# Altium PCB PCB1.PcbDoc
Units mm, origin at the board's own origin, x right, y up, seen from the top; angles counter-clockwise.
Board outline 200 x 200 mm, 2 copper layers (Top Layer, Bottom Layer); 133 components, 113 nets, 472 pads, 12 vias.
Unrouted connection lines stored in the file: 94.
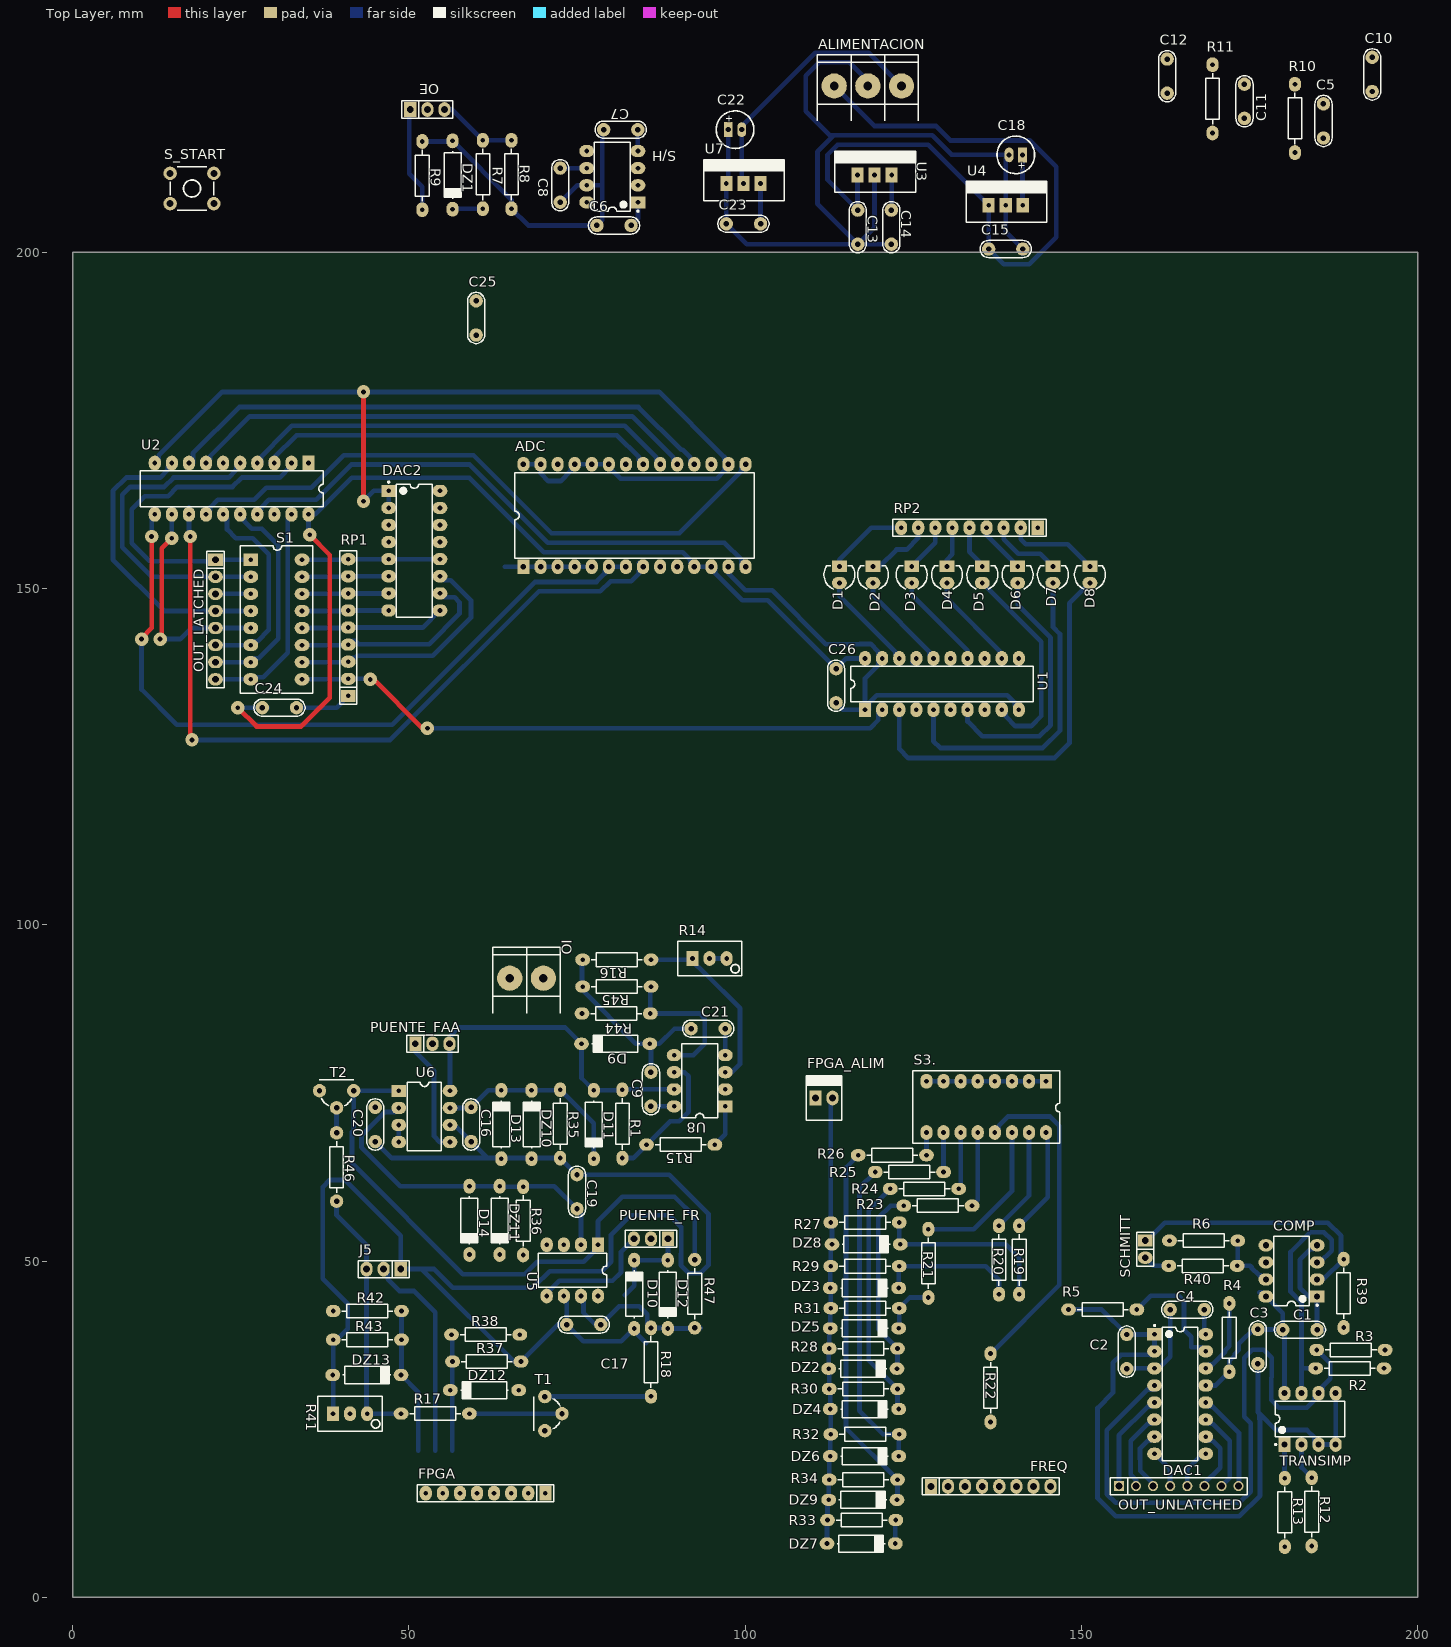
[diagram p0: Top Layer view]
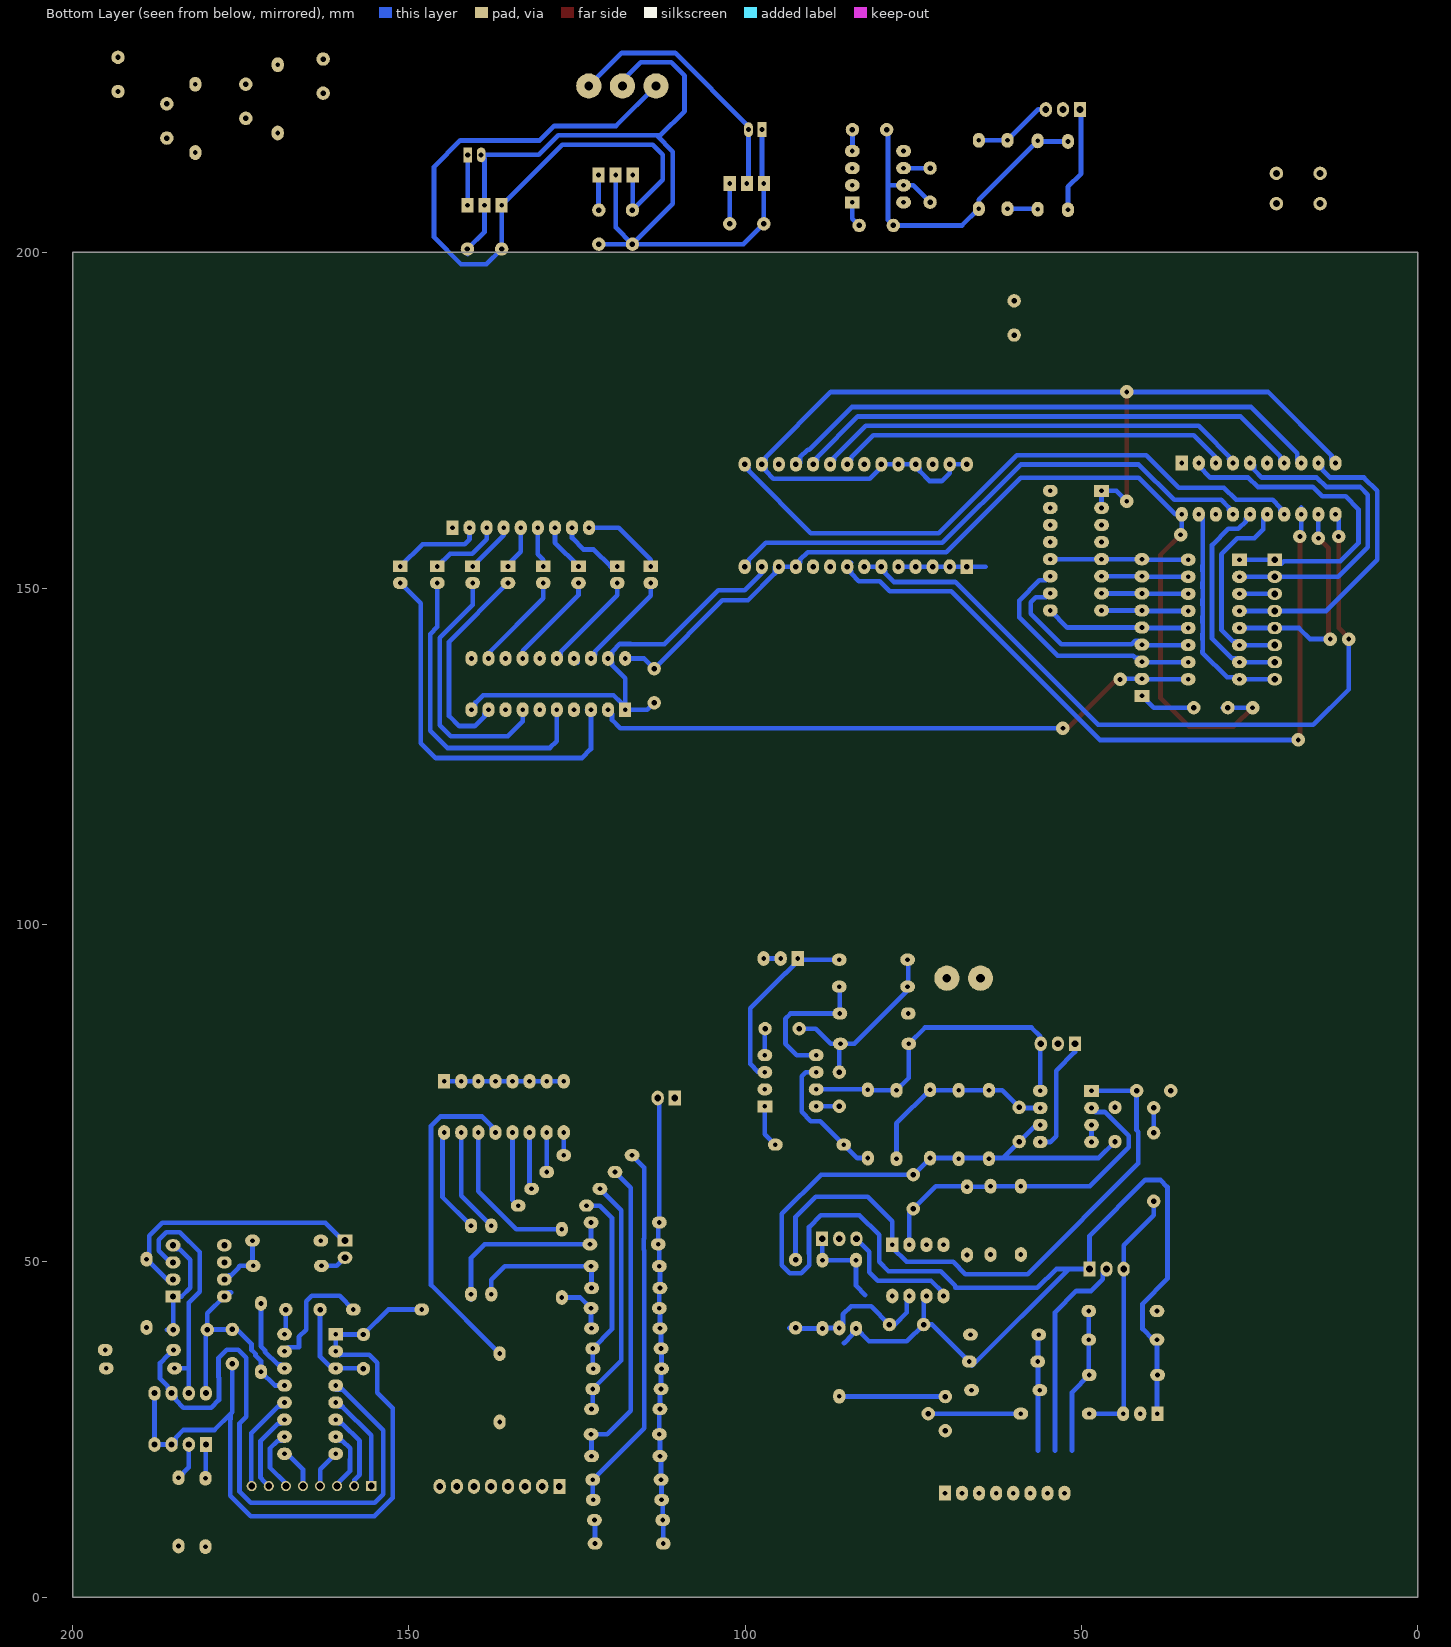
[diagram p1: Bottom Layer view, seen from below]

## Layer stack, top to bottom
Top Solder: solder mask 0.0102, Solder Resist, Dk 3.5
Top Layer: signal copper 0.0356
Dielectric 1: dielectric 0.32, FR-4, Dk 4.8
Bottom Layer: signal copper 0.0356
Bottom Solder: solder mask 0.0102, Solder Resist, Dk 3.5

## Board outline
0,0 0,200 200,200 200,0 0,0

## Design rules (kind name [scope] priority, off if disabled: settings)
Clearance [All] p1: gap=0.7
PolygonConnect [All] p1: connectstyle=Relief reliefconductorwidth=0.254 reliefentries=4 polygonreliefangle="90 Angle" airgapwidth=0.254
RoutingVias [All] p1: holewidth=0.7 width=2 viastyle="Through Hole" minholewidth=0.7 minwidth=2 maxholewidth=0.7 maxwidth=2
SolderMaskExpansion [All] p1: expansion=0.102
Width [All] p1: maxlimit=0.7 minlimit=0.7 preferedwidth=0.7
30 further rules are at their usual default settings.

## Components (designator, comment, footprint, x,y, rotation, side; value= is the part's Value field where it differs from the comment)
ADC "ADC0808CCN" DIP28 67.04,153.26 r90 top
ALIMENTACION "BORNERA 3" BORNERA3 118.25,224.75 r270 top
C1 "100n" CAP200 182.5,39.8 r0 top
C2 "100n" CAP200 156.75,36.55 r270 top
C3 "100n" CAP200 176.25,37.3 r90 top
C4 "10n" CAP200 165.75,42.8 r0 top
C5 "100n" CAP200 186,219.54 r270 top
C6 "100n" CAP200 80.5,204 r180 top
C7 "100n" CAP200 81.5,218.25 r180 top
C8 "10n" CAP200 72.5,210 r270 top
C9 "CAP" CAP200 86,75.57 r90 top
C10 "10n" CAP200 193.25,226.46 r90 top
C11 "100n" CAP200 174.25,222.46 r270 top
C12 "100n" CAP200 162.75,226.21 r270 top
C13 "330n" CAP200 116.75,203.75 r270 top
C14 "100n" CAP200 121.75,203.75 r270 top
C15 "100n" CAP200 138.75,200.5 r0 top
C16 "100n" CAP200 59.25,70.32 r270 top
C17 "100n" CAP200 76,40.57 r0 top
C18 "10u" CAP100RP 140.25,214.5 r180 top
C19 "100n" CAP200 75,60.32 r90 top
C20 "100n" CAP200 45,70.32 r270 top
C21 "CAP" CAP200 94.5,84.57 r180 top
C22 "2.2u" CAP100RP 98.5,218.25 r0 top
C23 "1u" CAP200 99.75,204.25 r180 top
C24 "100n" CAP200 30.75,132.3 r0 top
C25 "CAP" CAP200 60,190.25 r90 top
C26 "CAP" CAP200 113.52,135.56 r270 top
COMP "LM311N" N08E#1 181.25,48.55 r180 top
D1 "LED" LED3 114.02,152.06 r90 top
D2 "LED" LED3 119.02,152.06 r90 top
D3 "LED" LED3 124.77,152.06 r90 top
D4 "LED" LED3 130.02,152.06 r90 top
D5 "LED" LED3 135.27,152.06 r90 top
D6 "LED" LED3 140.52,152.06 r90 top
D7 "LED" LED3 145.77,152.06 r90 top
D8 "LED" LED3 151.27,152.06 r90 top
D9 "DIODO" DO41 80.75,82.32 r180 top
D10 "DIODO" DO41 83.5,45.07 r90 top
D11 "DIODO" DO41 77.5,70.32 r270 top
D12 "DIODO" DO41 88.5,45.07 r270 top
D13 "DIODO" DO41 63.75,70.32 r90 top
D14 "DIODO" DO41 59,56.07 r270 top
DAC1 "DAC0800LCN" N16E 164.69,30.24 r0 top
DAC2 "DAC0800LCN" N16E 50.81,155.65 r0 top
DZ1 "3.3V" DO41 56.5,211.5 r270 top
DZ2 "3.6V" DO41 117.5,34 r0 top
DZ3 "3.6V" DO41 117.75,46 r0 top
DZ4 "3.6V" DO41 117.75,28 r0 top
DZ5 "3.6V" DO41 117.75,40 r0 top
DZ6 "3.6V" DO41 117.75,21 r0 top
DZ7 "3.6V" DO41 117.25,8 r0 top
DZ8 "3.6V" DO41 118,52.5 r0 top
DZ9 "3.6V" DO41 117.5,14.5 r0 top
DZ10 "5.6V" DO41 68.25,70.32 r90 top
DZ11 "5.6V" DO41 63.5,56.07 r270 top
DZ12 "3.6V" DO41 61.25,30.82 r180 top
DZ13 "3.6V" DO41 43.75,33.07 r0 top
FPGA "CON8" SIP8#1 70.29,15.5 r180 top
FPGA_ALIM "MOLEX2" MOLEX2 110.46,74.25 r0 top
FREQ "CON8" SIP8#2 127.63,16.5 r0 top
IO "BORNERA 2" BORNERA2 67.5,92.07 r270 top
J5 "SAR/MOD" JUMPER3 46.25,48.82 r180 top
OE "JUMPER" JUMPER3 52.75,221.25 r0 top
OUT_LATCHED "CON8" SIP8#2 21.25,154.3 r270 top
OUT_UNLATCHED "CON8" SIP8#3 155.59,16.55 r0 top
PUENTE_FAA "JUMPER" JUMPER3 53.5,82.32 r0 top
PUENTE_FR "JUMPER" JUMPER3 86,53.32 r180 top
R1 "4k7" RES400#1 81.75,65.32 r90 top
R2 "1K5" RES400#1 184.84,34.05 r0 top
R3 "1K" RES400#1 195.16,36.8 r180 top
R4 "5K" RES400#1 172,43.71 r270 top
R5 "5K" RES400#1 158.25,42.8 r180 top
R6 "1K" RES400#1 173.25,53.05 r180 top
R7 "560" RES400#1 61,206.5 r90 top
R8 "1K" RES400#1 65.25,206.5 r90 top
R9 "1K" RES400#1 52,216.5 r270 top
R10 "5K" RES400#1 181.75,225 r270 top
R11 "5K" RES400#1 169.5,227.91 r270 top
R12 "1K" RES400#1 184.25,17.8 r270 top
R13 "1k5" RES400#1 180.25,7.55 r90 top
R14 "10k" "PRESET V" 94.71,95 r0 top
R15 "4k7" RES400#1 95.5,67.32 r180 top
R16 "4k7" RES400#1 86,94.82 r180 top
R17 "2k2" RES400#1 59,27.32 r180 top
R18 "6k8" RES400#1 86,29.91 r90 top
R19 "10k" RES400#1 140.75,55.25 r270 top
R20 "10k" RES400#1 137.75,55.25 r270 top
R21 "10k" RES400#1 127.25,54.75 r270 top
R22 "10k" RES400#1 136.5,36.25 r270 top
R23 "10k" RES400#1 133.75,58.25 r180 top
R24 "10k" RES400#1 131.75,60.75 r180 top
R25 "10k" RES400#1 129.51,63.25 r180 top
R26 "10k" RES400#1 126.97,65.75 r180 top
R27 "22k" RES400#1 112.75,55.75 r0 top
R28 "22k" RES400#1 112.5,37 r0 top
R29 "22k" RES400#1 112.75,49.25 r0 top
R30 "22k" RES400#1 112.5,31 r0 top
R31 "22k" RES400#1 112.75,43 r0 top
R32 "22k" RES400#1 112.75,24.25 r0 top
R33 "22k" RES400#1 112.25,11.5 r0 top
R34 "22k" RES400#1 112.5,17.5 r0 top
R35 "10k" RES400#1 72.5,65.32 r90 top
R36 "10k" RES400#1 67,50.91 r90 top
R37 "20k" RES400#1 56.5,35.07 r0 top
R38 "10k" RES400#1 66.5,39.07 r180 top
R39 "TBD" RES400#1 189,40.14 r90 top
R40 "TBD" RES400#1 163,49.3 r0 top
R41 "PRESET" "PRESET V" 41.25,27.32 r0 top
R42 "10K" RES400#1 38.75,42.57 r0 top
R43 "20K" RES400#1 38.75,38.32 r0 top
R44 "4k7" RES400#1 75.75,86.82 r0 top
R45 "4k7" RES400#1 86,90.82 r180 top
R46 "2k2" RES400#2 39.25,69.07 r270 top
R47 "6k8" RES400#2 92.5,40.07 r90 top
RP1 "R-PACK 8+1" RESNET8+1 41,134.05 r90 top
RP2 "R-PACK 8+1" RESNET8+1 143.52,159.06 r180 top
S1 "SW-DIP8" DIP-16-KEY 26.5,154.3 r270 top
S3. "SW-DIP8" DIP-16-KEY 144.75,76.75 r180 top
S/H "LF398N" N08E#2 80.25,211.25 r180 top
S_START "TACT SWITCH" TACTSWITCH 17.75,209.5 r90 top
SCHMITT "JUMPER" JUMPER2 159.5,51.78 r270 top
T1 "TRANSISTOR NPN" TO92 71.5,27.32 r90 top
T2 "TRANSISTOR NPN" TO92 39.25,74.07 r0 top
TRANSIMP "LM358N" N08E#1 184,26.55 r90 top (schematic designator TRANSIMPEDANCIA)
U1 "SN74LS244N" 738-03 129.27,135.81 r0 top
U2 "MC74HC374N" 738-03 23.65,164.86 r180 top
U3 "7805" "TO-220 V" 119.25,211.5 r0 top
U4 "MC33269" "TO-220 V" 138.75,207 r0 top
U5 "MAX297CPA" DIP8 78.12,52.44 r270 top
U6 "MAX297CPA" DIP8 48.5,75.32 r0 top
U7 "7905" "TO-220 V" 99.75,210.25 r0 top
U8 "TL082ACJG" 693-02 93.25,76.82 r90 top

## Footprints (in the part's own frame and the unit in brackets; to place one, negate y for a bottom-side part, rotate by r counter-clockwise, add the part's x,y. Pads: shape width x height; smd on the part's side, far side on the other; paste and mask are expansions set on the pad)
693-02 [mm] "DIP; 8 Leads; Row Spacing 7.62 mm; Pitch 2.54 mm"
  rect 1.8x2.2 hole 0.7: 1(-3.81,-3.81)
  oval 1.8x2.2 hole 0.7: 2(-1.27,-3.81) 3(1.27,-3.81) 4(3.81,-3.81) 5(3.81,3.81) 6(1.27,3.81) 7(-1.27,3.81) 8(-3.81,3.81)
  silkscreen extent -5.5,-2.65 5.5,2.65
738-03 [mm] "DIP; 20 Leads; Row Spacing 7.62 mm; Pitch 2.54 mm"
  rect 1.8x2.2 hole 0.7: 1(-11.43,-3.81)
  oval 1.8x2.2 hole 0.7: 2(-8.89,-3.81) 3(-6.35,-3.81) 4(-3.81,-3.81) 5(-1.27,-3.81) 6(1.27,-3.81) 7(3.81,-3.81) 8(6.35,-3.81) 9(8.89,-3.81) 10(11.43,-3.81) 11(11.43,3.81) 12(8.89,3.81) 13(6.35,3.81) 14(3.81,3.81) 15(1.27,3.81) 16(-1.27,3.81) 17(-3.81,3.81) 18(-6.35,3.81) 19(-8.89,3.81) 20(-11.43,3.81)
  silkscreen extent -13.6,-2.65 13.6,2.65
BORNERA2 [mm] "Bornera con Tornillos 5mm separación"
  round 3.75 hole 1.3: 1(0,2.5) 2(0,-2.5)
  silkscreen extent -4.6,-5 5.2,5, body extent -3.76,-4.89 3.94,5.61, height 10
BORNERA3 [mm] "Bornera con Tornillos 5mm separación"
  round 3.75 hole 1.3: 1(0,5) 2(0,0) 3(0,-5)
  silkscreen extent -4.6,-7.5 5.2,7.5, body extent -3.76,-7.39 3.94,8.11, height 10.05
CAP100RP [mm] "Body diameter 5mm"
  rect 1.3x2.2 hole 0.762: 1(-1,0)
  oval 1.3x2.2 hole 0.762: 2(1,0)
  silkscreen extent -2.79,-2.79 2.79,2.79, body extent -2.53,-2.51 2.53,2.54, height 11.53
CAP200 [mm]
  round 2 hole 0.813: 1(-2.54,0) 2(2.54,0)
  silkscreen extent -3.81,-1.27 3.81,1.27, body extent -2.79,-1.17 2.79,1.12, height 6.24
DIP8 [mm]
  rect 2.2x1.8 hole 0.7: 1(0,0)
  oval 2.2x1.8 hole 0.7: 2(0,-2.54) 3(0,-5.08) 4(0,-7.62) 5(7.62,-7.62) 6(7.62,-5.08) 7(7.62,-2.54) 8(7.62,0)
  silkscreen extent 1.27,-8.89 6.35,1.27, body extent -0.06,-9.21 7.7,1.59, height 4.5
DIP28 [mm]
  rect 2.2x1.8 hole 0.813: 1(0,0)
  oval 2.2x1.8 hole 0.813: 2(0,-2.54) 3(0,-5.08) 4(0,-7.62) 5(0,-10.16) 6(0,-12.7) 7(0,-15.24) 8(0,-17.78) 9(0,-20.32) 10(0,-22.86) 11(0,-25.4) 12(0,-27.94) 13(0,-30.48) 14(0,-33.02) 15(15.24,-33.02) 16(15.24,-30.48) 17(15.24,-27.94) 18(15.24,-25.4) 19(15.24,-22.86) 20(15.24,-20.32) 21(15.24,-17.78) 22(15.24,-15.24) 23(15.24,-12.7) 24(15.24,-10.16) 25(15.24,-7.62) 26(15.24,-5.08) 27(15.24,-2.54) 28(15.24,0)
  silkscreen extent 1.27,-34.29 13.97,1.27, body extent -0.19,-34.54 15.43,1.47, height 4.66
DIP-16-KEY [mm] "DIP; 16 Leads; Row Spacing 7.62 mm; Pitch 2.54 mm"
  rect 1.8x2.2 hole 0.7: 1(0,0)
  oval 1.8x2.2 hole 0.7: 2(2.54,0) 3(5.08,0) 4(7.62,0) 5(10.16,0) 6(12.7,0) 7(15.24,0) 8(17.78,0) 9(17.78,7.62) 10(15.24,7.62) 11(12.7,7.62) 12(10.16,7.62) 13(7.62,7.62) 14(5.08,7.62) 15(2.54,7.62) 16(0,7.62)
  silkscreen extent -2.05,-1.59 19.83,9.2
DO41 [mm]
  oval 2.2x1.8 hole 0.7: 1(-5.08,0) 2(5.08,0)
  silkscreen extent -3.56,-1.27 3.56,1.27, body extent -5.46,-1.19 5.46,1.37, height 2.03
JUMPER2 [mm]
  rect 1.8x2.2 hole 1.016: 1(-1.27,0)
  oval 1.8x2.2 hole 1.016: 2(1.27,0)
  silkscreen extent -2.54,-1.27 2.54,1.27, body extent -2.46,-1.27 2.54,1.27, height 9.5
JUMPER3 [mm]
  rect 1.8x2.2 hole 1.016: 1(-2.54,0)
  oval 1.8x2.2 hole 1.016: 2(0,0) 3(2.54,0)
  silkscreen extent -3.81,-1.27 3.81,1.27, body extent -3.81,-1.3 3.81,1.27, height 16.15
LED3 [mm]
  oval 1.8x2.2 hole 0.7: 1(-1.219,0)
  rect 1.7x2.2 hole 0.7: 2(1.245,0)
  silkscreen extent -2.13,-2.3 1.36,2.3, body extent -1.65,-1.63 1.65,1.66, height 0.49
MOLEX2 [mm]
  rect 1.8x2.2 hole 1.016: 1(0,0)
  oval 1.8x2.2 hole 1.016: 2(2.54,0)
  silkscreen extent -1.4,-3.3 3.94,3.3, body extent -1.27,-3.17 3.81,3.17, height 10.74
N08E#1 [mm] "DIP, 8-Leads, Row Spacing 7.62mm, Pitch 2.54mm, Body 9.91x6.35mm"
  rect 2.2x1.8 hole 0.9: 1(-3.81,3.81)
  oval 2.2x1.8 hole 0.9: 2(-3.81,1.27) 3(-3.81,-1.27) 4(-3.81,-3.81) 5(3.81,-3.81) 6(3.81,-1.27) 7(3.81,1.27) 8(3.81,3.81)
  silkscreen extent -3.94,-5.15 2.65,5.23, body extent -3.6,-5.15 3.6,5.15, height 5.34
N08E#2 [mm] "DIP, 8-Leads, Row Spacing 7.62mm, Pitch 2.54mm, Body 9.91x6.35mm"
  rect 2.2x1.8 hole 0.7: 1(-3.81,3.81)
  oval 2.2x1.8 hole 0.7: 2(-3.81,1.27) 3(-3.81,-1.27) 4(-3.81,-3.81) 5(3.81,-3.81) 6(3.81,-1.27) 7(3.81,1.27) 8(3.81,3.81)
  silkscreen extent -3.94,-5.15 2.65,5.23, body extent -3.6,-5.15 3.6,5.15, height 5.34
N16E [mm] "DIP, 16-Leads, Row Spacing 7.62mm, Pitch 2.54mm, Body 19.3x6.35mm"
  rect 2.2x1.8 hole 0.7: 1(-3.81,8.89)
  oval 2.2x1.8 hole 0.7: 2(-3.81,6.35) 3(-3.81,3.81) 4(-3.81,1.27) 5(-3.81,-1.27) 6(-3.81,-3.81) 7(-3.81,-6.35) 8(-3.81,-8.89) 9(3.81,-8.89) 10(3.81,-6.35) 11(3.81,-3.81) 12(3.81,-1.27) 13(3.81,1.27) 14(3.81,3.81) 15(3.81,6.35) 16(3.81,8.89)
  silkscreen extent -3.93,-9.9 2.65,10.31, body extent -3.3,-9.9 3.3,9.9, height 4.32
"PRESET V" [mm]
  rect 1.8x2.2 hole 0.7: 1(-2.54,0)
  oval 1.8x2.2 hole 0.7: 2(0,0) 3(2.54,0)
  silkscreen extent -4.76,-2.6 4.76,2.6, body extent -4.7,-2.42 4.83,2.42, height 11.55
RES400#1 [mm]
  oval 2.2x1.8 hole 0.7: 1(0,0) 2(10.16,0)
  silkscreen extent 1.27,-1.02 8.89,1.02, body extent -0.3,-1.14 10.46,1.17, height 2.43
RES400#2 [mm]
  round 2 hole 0.813: 1(0,0) 2(10.16,0)
  silkscreen extent 1.27,-1.02 8.89,1.02, body extent -0.3,-1.14 10.46,1.17, height 2.43
RESNET8+1 [mm]
  rect 1.8x2.2 hole 0.7: 1(0,0)
  oval 1.8x2.2 hole 0.7: 2(2.54,0) 3(5.08,0) 4(7.62,0) 5(10.16,0) 6(12.7,0) 7(15.24,0) 8(17.78,0) 9(20.32,0)
  silkscreen extent -1.27,-1.27 21.59,1.27, body extent -1.09,-0.64 21.41,0.62, height 5.3
SIP8#1 [mm]
  rect 1.8x2.2 hole 0.7: 1(0,0)
  oval 1.8x2.2 hole 0.7: 2(2.54,0) 3(5.08,0) 4(7.62,0) 5(10.16,0) 6(12.7,0) 7(15.24,0) 8(17.78,0)
  silkscreen extent -1.27,-1.27 19.05,1.27, body extent -1.27,-1.27 19.05,1.27, height 8.38
SIP8#2 [mm]
  rect 1.8x2.2 hole 1.016: 1(0,0)
  oval 1.8x2.2 hole 1.016: 2(2.54,0) 3(5.08,0) 4(7.62,0) 5(10.16,0) 6(12.7,0) 7(15.24,0) 8(17.78,0)
  silkscreen extent -1.27,-1.27 19.05,1.27, body extent -1.27,-1.27 19.05,1.27, height 8.38
SIP8#3 [mm]
  rect 1.5x1.5 hole 1.016: 1(0,0)
  round 1.5 hole 1.016: 2(2.54,0) 3(5.08,0) 4(7.62,0) 5(10.16,0) 6(12.7,0) 7(15.24,0) 8(17.78,0)
  silkscreen extent -1.27,-1.27 19.05,1.27, body extent -1.27,-1.27 19.05,1.27, height 8.38
TACTSWITCH [mm]
  round 2 hole 1.016: 1(-2.25,-3.25) 2(-2.25,3.25) 3(2.25,-3.25) 4(2.25,3.25)
  silkscreen extent -3.25,-3.25 3.25,3.25, body extent -3.05,-3.95 3.15,3.95, height 7
TO92 [mm]
  round 2 hole 0.813: 1(0,-1.27) 2(2.54,1.27) 3(-2.54,1.27)
  silkscreen extent -2.54,-1 2.54,2.92, body extent -2.79,-1.55 2.79,2.79, height 8
"TO-220 V" [mm]
  rect 1.8x2.2 hole 0.7: 1(-2.54,0) 2(0,0) 3(2.54,0)
  silkscreen extent -5.9,-2.54 6.1,3.54, body extent -5,-2 5,3, height 18

## Part data
ADC: "28 pin 8-bit Microprocessor Compatible A/D Converters With 8-Channel Multiplexer 13 per tube"
C1 C2 C3 C4 C5 C6 C7 C8 C10 C11 C12 C13 C14 C15 C16 C17 C19 C20 C23 C24: library part CAP
C18 C22: library part CAPPOL
COMP: "Voltage Comparator, 8-pin MDIP"
DAC1 DAC2: "8-Bit D/A Converter, 16-pin MDIP"
DZ1 DZ2 DZ3 DZ4 DZ5 DZ6 DZ7 DZ8 DZ9 DZ10 DZ11 DZ12 DZ13: library part "DIODO ZENER"
J5 OE PUENTE_FAA PUENTE_FR: library part JUMPER3
R1 R2 R3 R4 R5 R6 R7 R8 R9 R10 R11 R12 R13 R15 R16 R17 R18 R19 R20 R21 R22 R23 R24 R25 R26 R27 R28 R29 R30 R31 R32 R33 R34 R35 R36 R37 R38 R39 R40 R42 R43 R44 R45 R46 R47: library part RES
R14: library part PRESET
S1 S3.: "4009 Series DIP Switch, Raised actuator"
S/H: "Monolithic Sample and Hold Circuits, 8-pin MDIP"
TRANSIMP: "Low Power Dual Operational Amplifier, 8-pin MDIP"
U1: "Octal Buffer/Line Driver with 3-State Outputs"
U2: "Octal 3-State Non-Inverting D-Type Flip-Flop"
U3 U4: library part 78XX, "REGULDOR POSITIVO"
U5 U6: "Active Filter Single SW-CAP Low Pass 8th Order 50kHz 8-Pin PDIP N"
U7: library part 79XX, "REGULADOR NEGATIVO"
U8: "JFET-Input Operational Amplifier"

## Via types
v1: diameter 2, hole 0.711, Top Layer to Bottom Layer, 12 vias

## Nets (pads, with @x,y where several pads share a name; then routed paths per layer and width w, separated by ;. In a path a pad name is that pad's centre, name@x,y a point inside that pad or via, vN(x,y) a via of type N, cw(c..) or ccw(c..) an arc to the next point about the centre after c; other vN are vias at no path point)
B0: DAC2.5 DAC2.12 RP1.2 RP1.9 S1.9 S1.16 U1.2 U1.17 | length 112
  Top Layer w0.7: v1(44.25,136.5) 44.75,136.5 52,129.25 v1(52.75,129.25)
  Bottom Layer w0.7: S1.9 RP1.2@40.93,136.52 ; S1.16 RP1.9@40.93,154.3 ; RP1.2 v1@44.09,136.59 ; RP1.9 46.99,154.37 DAC2.5 DAC2.12 ; v1(52.75,129.25) 118.575,129.25 119.79,130.465 119.79,131.41 U1.2 ; U1.17@124.87,139.03 U1.17
B1: DAC2.11 RP1.3 S1.10 U1.15 | length 36.4
  Bottom Layer w0.7: S1.10 RP1.3@40.93,139.06 ; RP1.3 41.59,139.72 42.008,139.72 42.288,140 53.54,140 59.25,145.71 59.25,148.23 56.23,151.25 55.21,151.25 DAC2.11
B2: DAC2.10 RP1.4 S1.11 U1.13 | length 30.9
  Bottom Layer w0.7: S1.11 RP1.4@40.93,141.6 ; RP1.4 41.59,142.26 42.008,142.26 42.518,141.75 53,141.75 57.52,146.27 57.52,147.98 56.79,148.71 55.21,148.71 DAC2.10 DAC2.10@54.7,149.3
B3: DAC2.9 RP1.5 S1.12 U1.11 | length 21.5
  Bottom Layer w0.7: S1.12 RP1.5@40.93,144.14 ; RP1.5 52.07,144.21 DAC2.9
B4: DAC2.8 RP1.6 S1.13 U1.8 | length 12.8
  Bottom Layer w0.7: S1.13 RP1.6@40.93,146.68 ; RP1.6 41.01,146.76 DAC2.8
B5: DAC2.7 RP1.7 S1.14 U1.6 | length 12.8
  Bottom Layer w0.7: S1.14 RP1.7@40.93,149.22 ; RP1.7 46.99,149.29 DAC2.7
B6: DAC2.6 RP1.8 S1.15 U1.4 | length 12.8
  Bottom Layer w0.7: S1.15 RP1.8@40.93,151.76 ; RP1.8 41.01,151.84 DAC2.6
CLK_9FS: FPGA.6 T1.3 | length 0.5
  Top Layer w0.7: T1.3 T1.3@70.23,25.27
CLK_DAC: ADC.10 R18.1 T1.2 | length 14.8
  Bottom Layer w0.7: T1.2 84.96,29.86 85,29.82
CLK_FILTRO: FPGA.7 T2.3
FPGA_OE: DZ1.2 R7.1 R38.1 U2.1 | length 4.4
  Bottom Layer w0.7: DZ1.2@56.58,206.5 R7.1
FR_IN: D10.2 D12.1 PUENTE_FR.1 R13.2 TRANSIMP.1 U5.8 | length 18.9
  Bottom Layer w0.7: 82.13,44.95 83.5,46.32 D10.2 D12.1 88.54,50.19 PUENTE_FR.1 ; R13.2@180.19,17.77 TRANSIMP.1
GND: ADC.1 ADC.2 ADC.3 ADC.4 ADC.5 ADC.13 ADC.16 ADC.23 ADC.24 ADC.25 ADC.27 ADC.28 ALIMENTACION.2 C1.2 C2.1 C3.1 C5.2 C6.2 C7.2 C8.2 C9.2 C11.1 C12.1 C13.2 C14.2 C15.2 C16.2 C17.1 C18.2 C19.2 C20.2 C21.2 C22.1 C23.2 C24.2 C25.1 C26.2 COMP.1 COMP.4 D9.1 D10.1 D13.1 D14.2 DAC1.1 DAC1.2 DAC2.1 DAC2.2 DZ1.1 DZ2.1 DZ3.1 DZ4.1 DZ5.1 DZ6.1 DZ7.1 DZ8.1 DZ9.1 DZ10.1 DZ11.2 DZ12.1 DZ13.1 FPGA_ALIM.2 J5.1 R5.2 R8.1 R9.1 R11.1 R16.2 R27.1 R28.1 R29.1 R30.1 R31.1 R32.1 R33.1 R34.1 R35.1 R36.1 R37.2 R41.1 R43.1 R45.2 RP1.1 RP2.1 S/H.7 TRANSIMP.3 TRANSIMP.4 TRANSIMP.5 U1.1 U1.10 U1.19 U2.10 U3.2 U4.2 U5.6 U6.6 U7.1 | length 897.5
  Top Layer w0.7: v1(43.25,163) 43.5,163.25 43.25,163.5 v1(43.25,179.25)
  Bottom Layer w0.7: U2.10@12.01,168.46 U2.10 12.81,169.26 12.81,169.81 22.25,179.25 v1(43.25,179.25) 87.25,179.25 96.93,169.57 96.93,169.09 ADC.16 96.93,167.91 96.93,167.492 95.788,166.35 81.472,166.35 79.74,168.082 ADC.23 ADC.24 ADC.25 74.07,167.91 74.07,167.492 72.578,166 70.75,166 69.58,167.17 ADC.27 ADC.28 ; C24.2 39.25,132.3 RP1.1 ; R41.1@38.75,27.36 R43.1 39.3,38.32 40.9,39.92 40.9,43.67 37.2,47.37 37.2,61.02 38.25,62.07 40.5,62.07 48.79,53.78 J5.1 51.91,48.82 ; v1(43.25,163) 44.79,164.54 DAC2.1 DAC2.2 ; C20.2 47.46,65.32 61.71,65.32 ; R9.1 DZ1.1@56.42,216.5 ; U6.6@56,70.24 U6.6 56.79,70.24 C16.2 61.71,65.32 ; DZ1.1 65.25,207.83 R8.1 67.75,204 C6.2 78.75,204.79 78.75,209.75 ; 64.26,153.26 ADC.1 ADC.2 ADC.3 ADC.4 ADC.5 ; R37.2@66.25,34.48 51.91,48.82 ; R37.2 72.16,40.57 C17.1 ; C8.2 75.02,209.98 S/H.7 78.52,209.98 78.75,209.75 ; U5.6 73.46,44.4 C17.1 ; R16.2 75.75,94.73 75.75,90.32 83.75,82.32 D9.1 87.25,82.32 89.5,84.57 C21.2 ; C7.2@78.75,218.04 78.75,209.75 ; 85.292,37.82 84.05,39.062 84.05,39.99 D10.1 81.58,38.07 75.96,38.07 C17.1 ; C9.2 D9.1@86,82.15 ; ADC.13@96.97,153.26 ADC.13 97.52,152.282 100.052,149.75 104,149.75 112,141.75 117.012,141.75 117.032,141.77 118.648,141.77 119.79,140.628 119.79,140.21 U1.19 119.79,139.03 119.79,138.612 117.84,136.662 U1.1 ; U7.1 C23.2 100.25,201.21 C13.2 ; U7.1@97.5,210.54 C22.1 ; DZ7.1@112.46,7.71 DZ7.1 112.17,11.42 R33.1 112.25,14.33 DZ9.1 112.42,17.42 R34.1 112.5,20.83 DZ6.1 112.67,24.17 R32.1 112.75,27.92 DZ4.1 112.67,30.83 R30.1 112.5,33.92 DZ2.1 112.42,36.92 R28.1 112.5,39.83 DZ5.1 112.67,42.92 R31.1 112.75,45.92 DZ3.1 112.67,49.17 R29.1 112.75,52.33 DZ8.1 R27.1@112.92,55.58 ; R27.1 112.75,74 FPGA_ALIM.2 ; C26.2 114.54,132 U1.1 ; ALIMENTACION.2 118.25,225.5 115.5,228.25 111,228.25 109,226.25 109,221 112.6,217.4 113.17,217.4 ; U3.2 119.25,203.71 C13.2 ; C14.2 C13.2 ; U1.10 140.11,132.59 140.11,133.118 140,133.118 138.968,134.15 119.572,134.15 118.43,133.008 118.43,132.03 118.4,132 U1.1 ; C15.2@141.25,199.75 141.29,199.79 C15.2 138.75,203.04 U4.2 138.75,214 C18.2 130.69,214.5 127.79,217.4 113.17,217.4 ; R5.2 153.04,42.8 C2.1 160.84,39.09 DAC1.1 DAC1.2 160.29,36 160.29,36.06 155.901,36.06 154.7,34.859 154.7,30.41 152.42,28.13 152.39,28.16 152.39,14.785 155.125,12.05 173.48,12.05 176.57,15.14 176.57,26.46 176.5,26.53 176.5,27.3 ; C3.1 176.25,27.55 176.5,27.3 ; COMP.4 184.47,51.77 184.052,51.77 182.5,50.218 182.5,46.05 183.81,44.74 COMP.1 185.04,44.72 C1.2 C1.2@186,39.8 ; TRANSIMP.5 TRANSIMP.4 TRANSIMP.3 185.27,23.158 184.852,22.74 184.68,22.74 184.68,23.748 183.538,24.89 178.91,24.89 176.5,27.3 ; 51.91,48.82 53.75,48.82 56.542,46.028 68.75,46.028 68.75,46.32 70.93,48.5 78.68,48.5 80.07,49.89 80.07,53.89 83,56.82 88.73,56.82 90.49,55.06 90.49,51.119 90.45,51.079 90.45,49.381 91.651,48.18 93.349,48.18 94.55,49.381 94.55,57.02 88.71,62.86 C19.2 74.96,62.86 R35.1 68.25,65.32 61.71,65.32 ; 113.17,217.4 110.75,214.98 110.75,207.21 C13.2
NetADC_8: ADC.8 U2.13 | length 113.5
  Top Layer w0.7: v1(17.5,157.75) 17.5,127.75 v1(17.75,127.5)
  Bottom Layer w0.7: v1@17.3,158.05 U2.13 U2.13@17.3,162.05 ; v1@17.5,127.75 v1(17.75,127.5) 47.25,127.5 69.35,149.6 78.478,149.6 79.988,151.11 83.088,151.11 84.23,152.252 84.23,152.67 ADC.8 ADC.8@84.23,153.85
NetADC_14: ADC.14 U2.17 | length 82.8
  Bottom Layer w0.7: U2.17 28.05,161.64 28.05,162.058 29.192,163.2 36.2,163.2 41.45,168.45 59.03,168.45 70.67,156.81 96.928,156.81 99.47,154.268 99.47,153.26 ADC.14
NetADC_15: ADC.15 U2.14 | length 93.4
  Bottom Layer w0.7: U2.14 20.43,161.64 20.43,162.058 21.572,163.2 27,163.2 28.8,165 35.5,165 40.35,169.85 59.61,169.85 71.21,158.25 90.228,158.25 99.47,167.492 99.47,167.91 ADC.15
NetADC_17: ADC.17 U2.18
NetADC_18: ADC.18 U2.8 | length 83.5
  Bottom Layer w0.7: U2.8 17.89,168.67 17.89,170.12 24.77,177 84.142,177 90.492,170.65 90.708,170.65 91.85,169.508 91.85,168.67 92.27,168.67 ADC.18
NetADC_19: ADC.19 U2.7 | length 76.4
  Bottom Layer w0.7: U2.7 20.43,169.26 20.43,169.68 26.35,175.6 83.218,175.6 89.31,169.508 89.31,169.09 ADC.19
NetADC_20: ADC.20 U2.4 | length 67.4
  Bottom Layer w0.7: U2.4 27.46,168.7 U2.4@27.51,168.75 ; U2.4@28.05,169.29 U2.4@28.01,169.25 ; ADC.20 86.77,169.09 86.77,169.508 82.078,174.2 32.572,174.2 27.122,168.75 U2.4@27.51,168.75 ; U2.4@27.51,168.75 28.01,168.75 U2.4@28.01,169.25 ; U2.4@27.51,168.75 U2.4@28.01,169.25
NetADC_21: ADC.21 U2.3 | length 59.6
  Bottom Layer w0.7: U2.3@29.41,168.67 U2.3 30,169.5 33.3,172.8 80.938,172.8 84.23,169.508 84.23,169.09 ADC.21
NetC4_2: C4.2 DAC1.16 | length 3.8
  Bottom Layer w0.7: C4.2 168.29,39.34 DAC1.16
NetC8_1: C8.1 S/H.6 | length 3.9
  Bottom Layer w0.7: C8.1 72.52,212.52 S/H.6
NetC10_1: C10.1 DAC2.16
NetCOMP_2: COMP.2 R39.2 SCHMITT.1 | length 39.9
  Bottom Layer w0.7: SCHMITT.1 159.75,53.05 162.41,55.71 186.648,55.71 188.61,53.748 188.61,50.69 R39.2 185.98,47.28 COMP.2 COMP.2@185.08,47.3
NetCOMP_3: COMP.3 R2.1 TRANSIMP.7 | length 36.6
  Bottom Layer w0.7: TRANSIMP.7@182.73,29.82 TRANSIMP.7 182.73,34.05 ; R2.1 182.73,34.05 ; COMP.3 185.478,49.82 187.21,51.552 187.21,53.168 186.068,54.31 184.052,54.31 181.1,51.358 181.1,45.47 182.73,43.84 182.73,34.05
NetD1_1: D1.1 U1.18 | length 14.9
  Bottom Layer w0.7: D1.1 114.02,148.938 122.33,140.628 122.33,140.21 U1.18
NetD1_2: D1.2 RP2.9 | length 12.2
  Bottom Layer w0.7: D1.2 114.02,154.31 118.77,159.06 RP2.9
NetD2_1: D2.1 U1.16 | length 14.9
  Bottom Layer w0.7: D2.1 119.02,149.018 127.41,140.628 127.41,140.21 U1.16
NetD2_2: D2.2 RP2.8 | length 10
  Bottom Layer w0.7: D2.2 120.015,153.305 122.52,155.81 124.02,155.81 125.74,157.53 RP2.8
NetD3_1: D3.1 U1.14 | length 14.7
  Bottom Layer w0.7: D3.1 124.77,149.06 133.08,140.75 U1.14
NetD3_2: D3.2 RP2.7 | length 7.2
  Bottom Layer w0.7: D3.2 128.28,156.815 RP2.7
NetD4_1: D4.1 U1.12 | length 14.6
  Bottom Layer w0.7: D4.1 130.02,148.56 138.16,140.42 U1.12
NetD4_2: D4.2 RP2.6 | length 6.1
  Bottom Layer w0.7: D4.2 130.02,154.31 130.82,155.11 RP2.6
NetD5_1: D5.1 U1.9 | length 31.6
  Bottom Layer w0.7: D5.1 144.02,142.091 144.02,131.06 142.52,129.56 140.182,129.56 138.75,130.992 138.75,131.41 U1.9 U1.9@138.16,131.57
NetD5_2: D5.2 RP2.5 | length 6.5
  Bottom Layer w0.7: RP2.5 133.36,155.47 135.27,153.56 D5.2
NetD6_1: D6.1 U1.7 | length 38.8
  Bottom Layer w0.7: U1.7 133.08,130.25 135.27,128.06 143.77,128.06 145.42,129.71 145.42,142.671 140.52,147.571 D6.1
NetD6_2: D6.2 RP2.4 | length 7.7
  Bottom Layer w0.7: RP2.4 135.9,157.925 D6.2
NetD7_1: D7.1 U1.5 | length 47.4
  Bottom Layer w0.7: U1.5 128,127.33 129.02,126.31 144.27,126.31 146.82,128.86 146.82,143.251 145.77,144.301 D7.1
NetD7_2: D7.2 RP2.3 | length 10.7
  Bottom Layer w0.7: RP2.3 138.44,157.365 140.6,155.205 143.87,155.205 D7.2
NetD8_1: D8.1 U1.3 | length 58.3
  Bottom Layer w0.7: U1.3@123.51,132 U1.3 122.92,126.16 124.27,124.81 146,124.81 148.22,127.03 148.22,147.791 D8.1
NetD8_2: D8.2 RP2.2 | length 13.7
  Bottom Layer w0.7: RP2.2 140.98,157.35 141.725,156.605 147.97,156.605 D8.2
NetD9_2: D9.2 D11.1 PUENTE_FAA.3 R1.2 U6.8 U8.7 | length 48.8
  Bottom Layer w0.7: U6.8 56.12,83.44 57.42,84.74 73.25,84.74 D9.2 75.67,77.23 D11.1 81.67,75.4 R1.2 ; R1.2@81.82,75.55 U8.7
NetDAC1_4: DAC1.4 R3.2 TRANSIMP.6 | length 90.6
  Bottom Layer w0.7: DAC1.4 160.88,30.92 159.872,30.92 153.79,24.838 153.79,15.365 155.105,14.05 173.5,14.05 175.17,15.72 175.17,25.88 174.2,26.85 174.2,35.609 175.401,36.81 177.099,36.81 178.3,35.609 178.3,32.72 178.24,32.66 178.24,29.352 179.382,28.21 183.538,28.21 184.68,29.352 184.68,29.77 TRANSIMP.6 185.86,30.95 185.86,31.368 187,32.508 187,34.848 185.848,36 185.8,36 R3.2
NetDAC1_5: DAC1.5 OUT_UNLATCHED.1 | length 14.9
  Bottom Layer w0.7: OUT_UNLATCHED.1 155.59,24.098 159.872,28.38 160.29,28.38 DAC1.5
NetDAC1_6: DAC1.6 OUT_UNLATCHED.2 | length 11.9
  Bottom Layer w0.7: OUT_UNLATCHED.2 158.13,17.44 157.33,18.24 157.33,23.298 159.872,25.84 160.29,25.84 DAC1.6
NetDAC1_7: DAC1.7 OUT_UNLATCHED.3 | length 9.3
  Bottom Layer w0.7: OUT_UNLATCHED.3 160.67,16.88 158.75,18.8 158.75,20.502 158.73,20.522 158.73,22.158 159.872,23.3 160.29,23.3 DAC1.7
NetDAC1_8: DAC1.8 OUT_UNLATCHED.4 | length 5.8
  Bottom Layer w0.7: DAC1.8 163.18,19.05 163.18,16.58 OUT_UNLATCHED.4
NetDAC1_9: DAC1.9 OUT_UNLATCHED.5 | length 6.2
  Bottom Layer w0.7: OUT_UNLATCHED.5 165.75,19.05 168.05,21.35 DAC1.9
NetDAC1_10: DAC1.10 OUT_UNLATCHED.6 | length 9.8
  Bottom Layer w0.7: OUT_UNLATCHED.6 168.29,16.94 170.65,19.3 170.65,22.158 169.508,23.3 168.5,23.3 DAC1.10
NetDAC1_11: DAC1.11 OUT_UNLATCHED.7 | length 12.1
  Bottom Layer w0.7: DAC1.11 169.09,25.84 169.508,25.84 172.05,23.298 172.05,17.776 171.57,17.296 171.57,17.29 OUT_UNLATCHED.7
NetDAC1_12: DAC1.12 OUT_UNLATCHED.8 | length 14.7
  Bottom Layer w0.7: DAC1.12 169.09,28.38 169.508,28.38 173.45,24.438 173.45,16.63 OUT_UNLATCHED.8
NetDAC1_14: DAC1.14 R4.1 | length 11.4
  Bottom Layer w0.7: DAC1.14 169.09,34.64 169.508,34.64 171.4,36.532 171.4,36.769 172,37.369 R4.1
NetDAC1_15: DAC1.15 R5.1 | length 17.9
  Bottom Layer w0.7: R5.1 160.3,44.85 164.45,44.85 165.26,44.04 165.26,39.83 166.35,38.74 166.35,37.18 167.91,37.18 DAC1.15
NetDAC2_4: DAC2.4 R12.1 TRANSIMP.2 | length 5.6
  Bottom Layer w0.7: TRANSIMP.2 182.73,19.32 R12.1
NetDAC2_14: DAC2.14 R10.2
NetDAC2_15: DAC2.15 R11.2
NetDZ2_2: DZ2.2 FREQ.5 R23.2 R28.2 | length 28.1
  Bottom Layer w0.7: DZ2.2@122.66,34.08 R28.2 119.8,39.86 119.8,56.428 121.622,58.25 R23.2
NetDZ3_2: DZ3.2 FREQ.2 R20.2 R29.2 | length 21.2
  Bottom Layer w0.7: DZ3.2 122.83,49.17 R29.2@122.91,49.17 ; R29.2 135.75,49.25 137.75,47.25 R20.2 R20.2@137.75,45
NetDZ4_2: DZ4.2 FREQ.6 R24.2 R30.2 | length 35.9
  Bottom Layer w0.7: R24.2 118.4,57.56 118.4,35.222 122.622,31 R30.2 122.66,28.17 DZ4.2
NetDZ5_2: DZ5.2 FREQ.3 R21.2 R31.2 | length 7.9
  Bottom Layer w0.7: DZ5.2@122.91,40.08 R31.2 124.5,44.59 R21.2
NetDZ6_2: DZ6.2 FREQ.7 R25.2 R32.2 | length 47
  Bottom Layer w0.7: R25.2@119.34,63.25 117,60.91 117,27.75 120.5,24.25 R32.2 ; DZ6.2 R32.2@122.83,24.17
NetDZ7_2: DZ7.2 FREQ.4 R22.2 R33.2 | length 3.4
  Bottom Layer w0.7: DZ7.2 R33.2@122.33,11.42
NetDZ8_2: DZ8.2 FREQ.1 R19.2 R27.2 | length 28.1
  Bottom Layer w0.7: R27.2 122.91,52.67 DZ8.2 138.75,52.5 140.75,50.5 R19.2 R19.2@140.75,44.25
NetDZ9_2: DZ9.2 FREQ.8 R26.2 R34.2 | length 55.2
  Bottom Layer w0.7: R26.2@116.84,65.75 115,63.91 115,53.378 115.07,53.308 115.07,51.692 115,51.622 115,25.16 R34.2 DZ9.2@122.66,14.58
NetDZ12_2: DZ12.2 FPGA.2 R37.1 R38.2 | length 16.5
  Bottom Layer w0.7: 56.46,21.82 R38.2@56.46,38.32
NetDZ13_2: DZ13.2 FPGA.4 R42.2 R43.2 | length 21.7
  Bottom Layer w0.7: DZ13.2 51.38,30.52 51.38,21.82 ; DZ13.2@48.91,33.15 R43.2 R42.2
NetFPGA_3: FPGA.3 J5.2 | length 31.5
  Bottom Layer w0.7: J5.2 46.84,48.23 46.84,47.285 48.555,45.57 50.75,45.57 53.92,42.4 53.92,21.82
NetFPGA_8: FPGA.8 R41.2
NetIO_1: IO.1 R44.1
NetIO_2: IO.2 PUENTE_FR.2
NetOE_3: OE.3 R7.2 R8.2 | length 11.9
  Bottom Layer w0.7: OE.3 56.41,221.25 R7.2 R8.2
NetOUT_LATCHED_1: OUT_LATCHED.1 S1.1 U2.2 | length 51.1
  Bottom Layer w0.7: S1.1 OUT_LATCHED.1 20.66,153.71 20.242,153.71 19.902,154.05 11.48,154.05 8.8,156.73 8.8,161.8 10.72,163.72 14.188,163.72 15.588,165.12 23.768,165.12 25.168,166.52 30.808,166.52 32.54,168.252 U2.2
NetOUT_LATCHED_2: OUT_LATCHED.2 S1.2 U2.5 | length 48.6
  Bottom Layer w0.7: U2.5 24.65,168.4 24.33,168.4 24.33,167.662 23.188,166.52 15.008,166.52 13.608,165.12 8.57,165.12 7.4,163.95 7.4,156.15 11.79,151.76 OUT_LATCHED.2 S1.2
NetOUT_LATCHED_3: OUT_LATCHED.3 S1.3 U2.6 | length 5.3
  Bottom Layer w0.7: OUT_LATCHED.3 S1.3
NetOUT_LATCHED_4: OUT_LATCHED.4 S1.4 U2.9 | length 44.6
  Bottom Layer w0.7: U2.9 14.17,168.08 14.17,167.662 13.028,166.52 7.99,166.52 6,164.53 6,154.3 13.62,146.68 OUT_LATCHED.4 S1.4
NetOUT_LATCHED_5: OUT_LATCHED.5 S1.5 U2.12 | length 32.9
  Top Layer w0.7: v1(13,142.5) 13.25,142.75 13.25,156 v1(14.75,157.5)
  Bottom Layer w0.7: v1(13,142.5) 16,142.5 17.64,144.14 OUT_LATCHED.5 S1.5 ; v1@14.76,158.01 U2.12
NetOUT_LATCHED_6: OUT_LATCHED.6 S1.6 U2.15 | length 30.3
  Bottom Layer w0.7: OUT_LATCHED.6 S1.6 27.09,142.19 27.508,142.19 29.17,143.852 29.17,155.13 26.8,157.5 24.27,157.5 22.97,158.8 22.97,160.46 U2.15
NetOUT_LATCHED_7: OUT_LATCHED.7 S1.7 U2.16 | length 32.5
  Bottom Layer w0.7: OUT_LATCHED.7 S1.7 27.09,139.65 27.65,139.65 30.57,142.57 30.57,156.48 28.15,158.9 26.652,158.9 25.51,160.042 25.51,160.46 U2.16
NetOUT_LATCHED_8: OUT_LATCHED.8 S1.8 U2.19 | length 33.3
  Bottom Layer w0.7: OUT_LATCHED.8 S1.8 26.78,136.8 28.34,136.8 32,140.46 32,140.762 31.97,140.792 31.97,142.408 32,142.438 32,143.302 31.97,143.332 31.97,144.948 32,144.978 32,145.842 31.97,145.872 31.97,147.488 32,147.518 32,148.382 31.97,148.412 31.97,150.028 32,150.058 32,150.922 31.97,150.952 31.97,152.568 32,152.598 32,153.462 31.97,153.492 31.97,160.48 U2.19
NetPUENTE_FAA_1: PUENTE_FAA.1 U6.5 | length 17.6
  Bottom Layer w0.7: PUENTE_FAA.1 50.96,81.11 53.75,78.32 53.75,68.57 54.62,67.7 U6.5
NetPUENTE_FR_3: PUENTE_FR.3 U5.5 | length 18.5
  Bottom Layer w0.7: U5.5 70.5,45.238 72.362,47.1 80.28,47.1 81.55,48.37 81.55,51.41 PUENTE_FR.3
NetR1_1: R1.1 R15.2 U8.6 | length 20.4
  Bottom Layer w0.7: R1.1 83.34,65.32 R15.2 88.84,70.82 90.208,70.82 91.59,72.202 91.59,77.48 90.98,78.09 U8.6
NetR2_2: R2.2 R3.1
NetR12_2: R12.2 R13.1
NetR14_1: R14.1 R16.1 U8.3 | length 27.6
  Bottom Layer w0.7: R16.1 91.99,94.82 R14.1 92.17,94.582 93.902,92.85 93.96,92.85 ; 93.96,92.86 99.25,87.57 99.25,79.32 98.02,78.09 U8.3
NetR15_1: R15.1 U8.1 U8.2 | length 6.3
  Bottom Layer w0.7: R15.1 97.06,68.88 U8.1
NetR17_1: R17.1 T1.1 | length 13.8
  Bottom Layer w0.7: R17.1 T1.1
NetR19_1: R19.1 S3..16 | length 15.7
  Bottom Layer w0.7: R19.1 145,59.5 145,68.88 S3..16
NetR20_1: R20.1 S3..15 | length 15.7
  Bottom Layer w0.7: R20.1 142.21,59.71 S3..15
NetR21_1: R21.1 S3..14 | length 23.5
  Bottom Layer w0.7: R21.1 134,54.75 139.67,60.42 S3..14
NetR22_1: R22.1 S3..13 | length 49.5
  Bottom Layer w0.7: R22.1 146.7,46.45 146.7,70.138 145.338,71.5 139.082,71.5 137.72,70.138 137.72,69.72 S3..13
NetR23_1: R23.1 S3..12 | length 11.2
  Bottom Layer w0.7: R23.1 134.59,59.09 S3..12
NetR24_1: R24.1 S3..11 | length 8.8
  Bottom Layer w0.7: R24.1@131.75,60.5 132.05,60.8 S3..11
NetR25_1: R25.1 S3..10 | length 5.9
  Bottom Layer w0.7: R25.1 S3..10
NetR26_1: R26.1 S3..9 | length 3.4
  Bottom Layer w0.7: R26.1 S3..9
NetR40_1: R40.1 SCHMITT.2 | length 4
  Bottom Layer w0.7: SCHMITT.2 160.71,49.3 R40.1
NetR44_2: R44.2 R45.1 U8.5 | length 21.3
  Bottom Layer w0.7: R45.1@85.91,90.73 R44.2 93.25,86.82 94.01,86.06 94.01,82.33 92.31,80.63 U8.5
NetR46_1: R46.1 T2.1 | length 3.7
  Bottom Layer w0.7: R46.1 T2.1
NetR47_2: R47.2 T2.2 U5.1 U6.1 | length 90
  Bottom Layer w0.7: T2.2 41.79,69.449 41.55,69.209 41.55,64.52 58,48.07 67.25,48.07 69.08,49.9 75.998,49.9 78.12,52.022 U5.1 78.12,55.94 81.75,59.57 89.5,59.57 92.5,56.57 R47.2 ; T2.2@41.81,75.32 U6.1
NetU5_3: U5.3 U5.4
NetU6_3: U6.3 U6.4 | length 2.5
  Bottom Layer w0.7: U6.4 U6.3
OE_ADC: ADC.9 OE.1 R9.2 | length 15.9
  Bottom Layer w0.7: OE.1 50.05,221.25 50.05,211.7 52,209.75 R9.2
OUT_COMP: COMP.7 R6.1 R40.2 R42.1 | length 8
  Bottom Layer w0.7: R6.1 173.25,49.39 R40.2 175.128,49.3 175.29,49.138 175.29,49.012 176.432,47.87 COMP.7@176.75,47.87
SH_CONTROL: FPGA.5 S/H.8
SH_IN: PUENTE_FAA.2 S/H.3
SH_OUT: ADC.26 R39.1 S/H.5 | length 0.2
  Bottom Layer w0.7: ADC.26 ADC.26@72.12,168.67
START/EOC: ADC.6 ADC.7 ADC.22 S_START.1 U2.11 | length 111.1
  Top Layer w0.7: v1(10.25,142.5) 10.25,142.649 11.75,144.149 v1(11.75,157.75)
  Bottom Layer w0.7: v1(10.25,142.5) 10.25,135 15.5,129.75 47.52,129.75 68.77,151 77.898,151 79.15,152.252 79.15,152.67 ADC.6 ADC.7 ; v1(11.75,157.75) 11.75,160.58 U2.11 U2.11@12.25,161.02
VCC_3.3: C18.1 J5.3 R6.2 R17.2 R41.3 R46.2 S3..1 S3..2 S3..3 S3..4 S3..5 S3..6 S3..7 S3..8 U4.3 | length 63.9
  Top Layer w0.7: S3..5@134.5,76.84 S3..5
  Bottom Layer w0.7: R46.2 39.25,56.82 43.71,52.36 J5.3 43.71,27.4 R41.3 R17.2 ; S3..8 S3..7 S3..6 S3..5 S3..4 S3..3 S3..2 S3..1 ; U4.3@141.25,207.04 C18.1
VCC_5: ADC.11 ADC.12 C14.1 C16.1 C17.2 C24.1 C25.2 C26.1 D11.2 D12.2 D13.2 DZ10.2 FPGA_ALIM.1 OE.2 R18.2 R35.2 R47.1 S_START.3 U1.20 U2.20 U3.3 U5.7 U6.7 | length 207.7
  Top Layer w0.7: v1(24.55,132.3) 27.35,129.5 34,129.5 38.25,133.75 38.25,155 v1(35.25,158)
  Bottom Layer w0.7: v1(24.55,132.3) C24.1 C24.1@29,132.3 ; v1@35.08,158.33 U2.20 36.05,161.05 41.49,166.49 46.74,166.49 46.75,166.5 59,166.5 70.09,155.41 90.708,155.41 91.85,154.268 91.85,153.85 ADC.11 ADC.12 95.57,153.26 95.57,152.252 99.572,148.25 103.37,148.25 C26.1 115.04,139.62 U1.20 ; OE.2@52.16,221.5 52.5,221.5 OE.2 ; U6.7 C16.1@59.25,72.78 ; C16.1 61.79,75.4 D13.2 DZ10.2 72.42,75.4 R35.2 77.5,70.48 D11.2@77.5,65.49 ; U5.7 75.96,44.44 75.96,42.36 77.75,40.57 C17.2 81.25,43.28 84.25,43.28 85.45,42.08 85.45,40.62 R18.2 88.42,40.07 D12.2 92.42,39.99 R47.1 R47.1@93.419,40.07 ; D11.2@77.25,65.24 D11.2@77.5,65.49 ; D11.2 D11.2@77.5,65.49 ; C14.1@121.79,206.33 U3.3
VCC_10: ALIMENTACION.3 C1.1 C3.2 C5.1 C7.1 C9.1 C11.2 C13.1 C15.1 COMP.8 DAC1.13 DAC2.13 R4.2 R10.1 S/H.4 TRANSIMP.8 U3.1 U4.1 U8.8 | length 151.4
  Bottom Layer w0.7: C7.1 84.04,215.08 S/H.4 ; C9.1 U8.8@89.42,73.03 ; ALIMENTACION.3 119.2,218.8 128.37,218.8 130.52,216.65 142.335,216.65 146.25,212.735 146.25,202.25 142.25,198.25 138.46,198.25 C15.1 U4.1 127.21,216 113.75,216 112.25,214.5 112.25,210.79 C13.1@116.71,206.33 ; U3.1 C13.1@116.71,206.33 ; C13.1 C13.1@116.71,206.33 ; DAC1.13 169.96,31.51 R4.2 172,35.152 172.8,35.952 172.8,36.189 173.4,36.789 173.4,37.7 173.5,37.8 175.895,40.195 C3.2 179.92,39.84 C1.1 ; 176.432,45.33 176.85,45.33 COMP.8 179.96,42.22 C1.1 ; TRANSIMP.8 180.19,39.57 C1.1
VEE_5: C19.1 C20.1 C23.1 D14.1 DZ11.1 R14.2 R14.3 R36.2 U5.2 U6.2 U7.3 | length 59
  Bottom Layer w0.7: U6.2 47.91,72.19 46.511,72.19 42.95,68.629 42.95,66.931 48.731,61.15 D14.1 DZ11.1 63.58,61.07 R36.2 67.08,61.15 71.63,61.15 C19.1 75.58,57.2 U5.2 ; R14.2 R14.3 ; C23.1 U7.3
VEE_10: ALIMENTACION.1 C2.2 C4.1 C6.1 C10.2 C12.2 C21.1 C22.2 DAC1.3 DAC2.3 S/H.1 U7.2 U8.4 | length 60.5
  Bottom Layer w0.7: C6.1 84.06,205.02 S/H.1 ; U8.4 C21.1@97.06,84.55 ; U7.2@99.5,210.5 C22.2 99.5,218.73 110.42,229.65 118.35,229.65 ALIMENTACION.1 ; C2.2 156.79,34.05 DAC1.3 161.5,34.05 163.21,35.76 C4.1
pads on no net: COMP.5 COMP.6 FPGA.1 S/H.2 S_START.2 S_START.4

## Text inside footprints (layer, text, board x,y; h text height)
C18: Top Overlay "+" at 141.698,213.332 h1.02 r180
C22: Top Overlay "+" at 97.052,219.418 h1.02